# Altium PCB STC12C5A_DIP40_Mini.PcbDoc
Units mil, origin at the board's own origin, x right, y up, seen from the top; angles counter-clockwise.
Board outline 1220 x 2920 mil, 2 copper layers (Top Layer, Bottom Layer); 37 components, 81 nets, 204 pads, 15 vias.
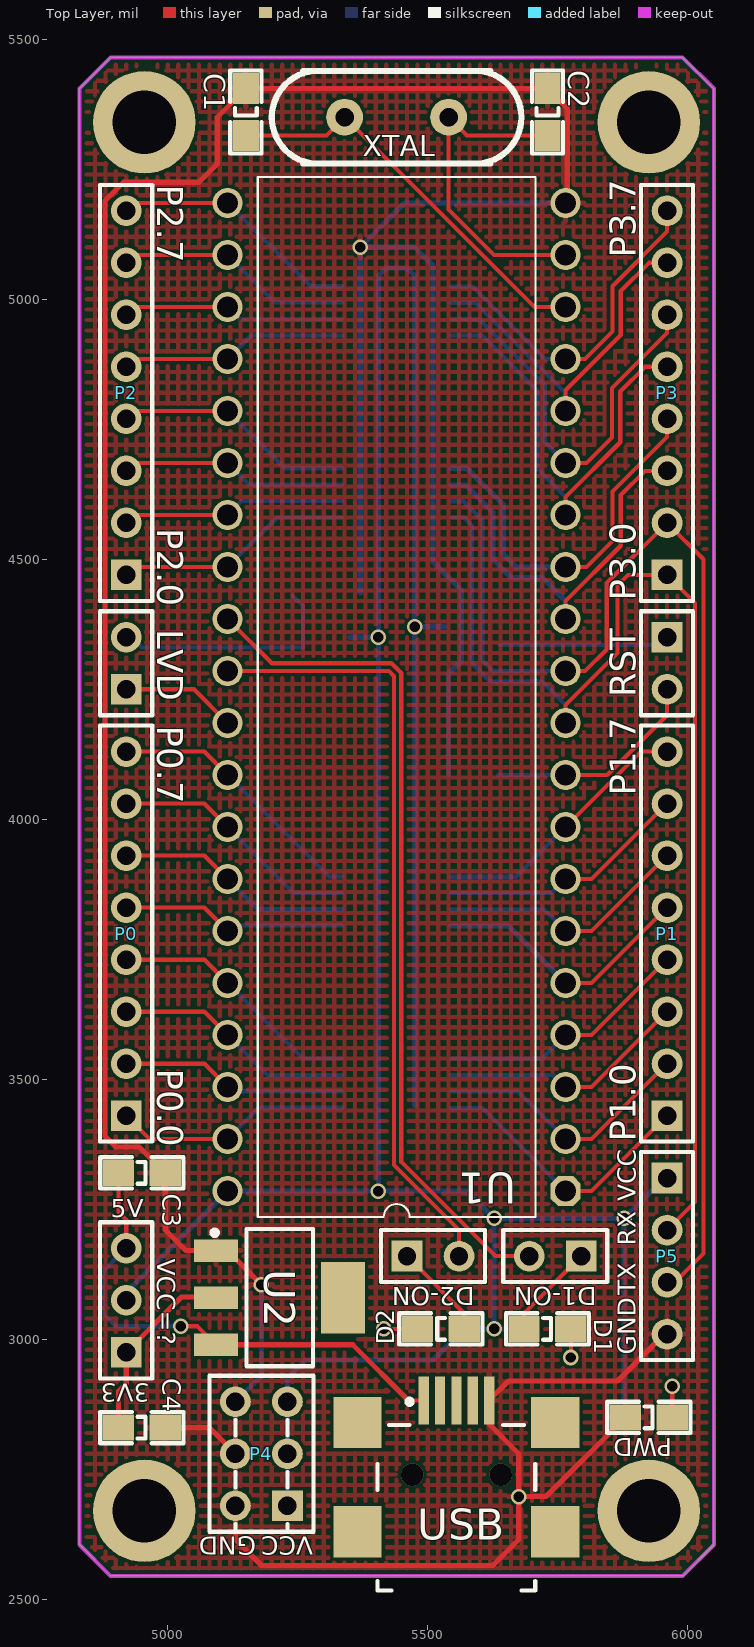
[diagram p0: Top Layer view]
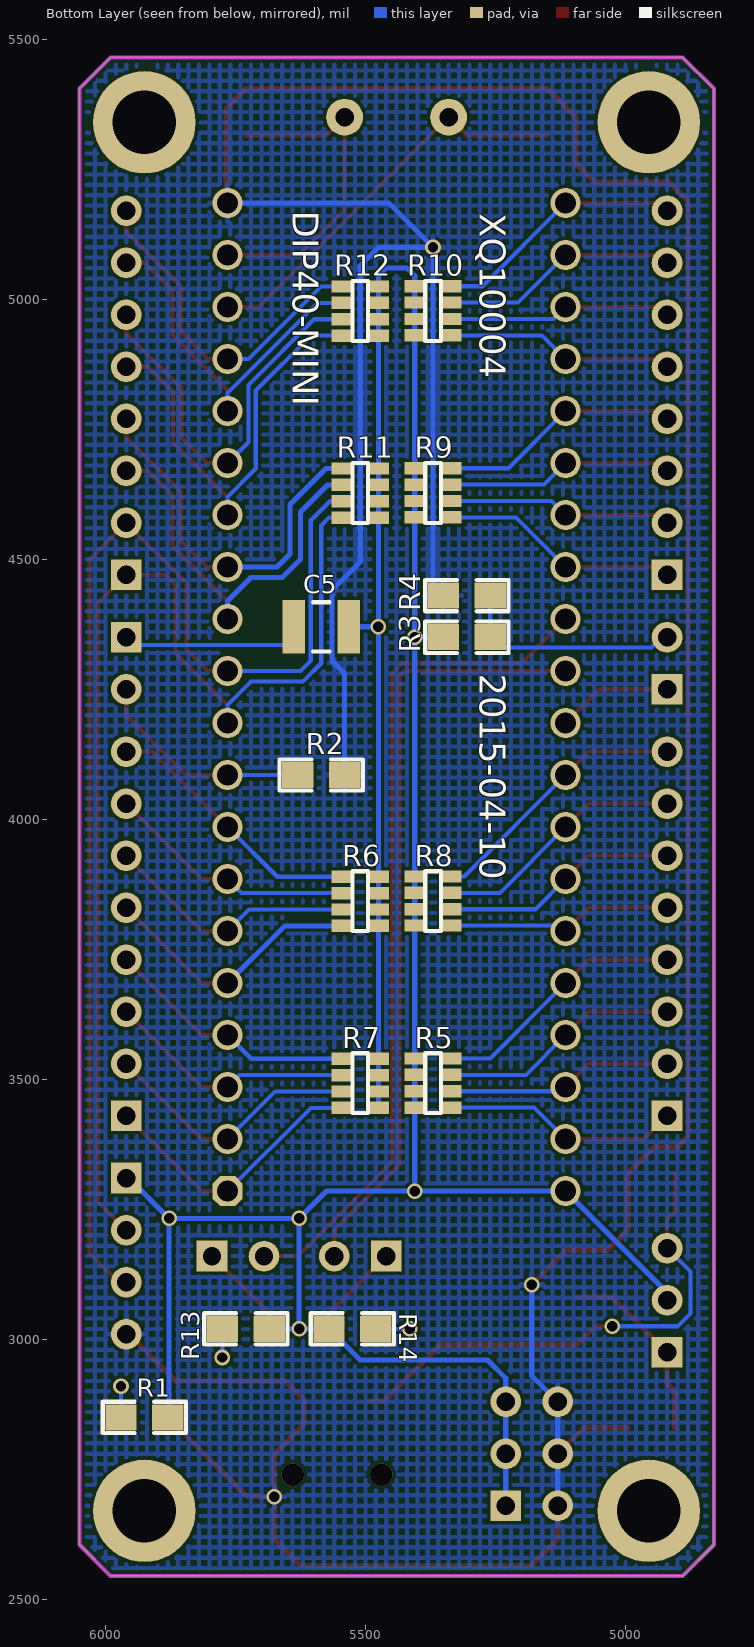
[diagram p1: Bottom Layer view, seen from below]

## Layer stack, top to bottom
Top Layer: signal copper 1.4
Dielectric: dielectric 12.6, FR-4, Dk 4.8
Bottom Layer: signal copper 1.4

## Board outline
4830,2605 4830,5405 4890,5465 5990,5465 6050,5405 6050,2605 5990,2545 4890,2545

## Design rules (kind name [scope] priority, off if disabled: settings)
Clearance [All] p1: gap=6
FabricationTestPointUsage TestPointUsage [All] p1: valid=0 allowmultiple=FALSE
FabricationTestpoint Testpoint [All] p1: side=3 testpointundercomponent=TRUE minsize=40 maxsize=100 preferedsize=60 minholesize=0 maxholesize=40 preferedholesize=32 testpointgrid=1 allowsidetop=TRUE allowsidebottom=TRUE usegrid=TRUE gridtolerance=0.01
HoleSize [All] p1: absolutevalues=TRUE maxlimit=200 minlimit=1 maxpercent=80.000 minpercent=20.000
MinimumSolderMaskSliver [All] p1: minsoldermaskwidth=6
PolygonConnect [All] p1: connectstyle=Relief reliefconductorwidth=10 reliefentries=4 polygonreliefangle="90 Angle"
RoutingVias [All] p1: holewidth=20 width=30 viastyle="Through Hole" minholewidth=20 minwidth=30 maxholewidth=30 maxwidth=50
SilkToSilkClearance [All] p1: silktosilkclearance=6
SilkscreenOverComponentPads [All] p1: minsilkscreentomaskgap=6
SolderMaskExpansion [All] p1: expansion=4
Width [All] p1: maxlimit=200 minlimit=6 preferedwidth=8
22 further rules are at their usual default settings.

## Components (designator, comment, footprint, x,y, rotation, side; value= is the part's Value field where it differs from the comment)
C1 "Cap" C0805 5150,5315 r90 top
C2 "Cap" C0805 5730,5315 r90 top
C3 "Cap" C0805 4995,3320 r180 top
C4 "Cap" C0805 4995,2830 r180 top
C5 "Cap2" C1210 5585,4370 r0 bottom
D1 "LED" C0805 5775,3020 r180 top (schematic designator D2)
D1-ON "Header 2" HDR1X2 5795,3160 r180 top (schematic designator LED1)
D2 "LED" C0805 5480,3020 r0 top (schematic designator D3)
D2-ON "Header 2" HDR1X2 5460,3160 r0 top (schematic designator LED2)
LVD "Header 2" HDR1X2 4920,4250 r90 top locked
P0 "Header 8" HDR1X8 4920,3430 r90 top locked
P1 "Header 8" HDR1X8 5960,3430 r90 top locked
P2 "Header 8" HDR1X8 4920,4470 r90 top locked
P3 "Header 8" HDR1X8 5960,4470 r90 top
P4 "Header 3X2" HDR2X3 5230,2680 r90 top
P5 "Header 4" HDR1X4 5960,3310 r270 top
PWD "PWB" C0805 5970,2850 r180 top (schematic designator D1)
R1 "Res" 0805 5970,2850 r180 bottom
R2 "Res" 0805 5540,4085 r0 bottom
R3 "Res" 0805 5260,4350 r0 bottom
R4 "Res" 0805 5350,4430 r180 bottom
R5 "RES_8P" RES_8P_0603 5405,3540 r180 bottom
R6 "RES_8P" RES_8P_0603 5405,3890 r180 bottom
R7 "RES_8P" RES_8P_0603 5475,3445 r0 bottom
R8 "RES_8P" RES_8P_0603 5475,3795 r0 bottom
R9 "RES_8P" RES_8P_0603 5405,4675 r180 bottom
R10 "RES_8P" RES_8P_0603 5405,5025 r180 bottom
R11 "RES_8P" RES_8P_0603 5475,4580 r0 bottom
R12 "RES_8P" RES_8P_0603 5475,4930 r0 bottom
R13 "Res" 0805 5775,3020 r180 bottom
R14 "Res" 0805 5480,3020 r0 bottom
RST "Header 2" HDR1X2 5960,4350 r270 top locked
U1 "STC12C5A60S2_DIP40" DIP40 5765,3285 r180 top locked
U2 "AMS1117" SOT-223 5215,3080 r270 top
USB "USB-MINI" USB-MINI-B-SM 5555,2785 r270 top (schematic designator J1)
VCC=? "Header 3" HDR1X3 4920,2975 r90 top (schematic designator P7)
XTAL "XTAL" XTAL1 5340,5350 r0 top locked (schematic designator Y1)

## Footprints (in the part's own frame and the unit in brackets; to place one, negate y for a bottom-side part, rotate by r counter-clockwise, add the part's x,y. Pads: shape width x height; smd on the part's side, far side on the other; paste and mask are expansions set on the pad)
0805 [mil]
  rect 60x50 smd: 1(0,0) 2(90,0)
  silkscreen extent -35,-30 125,30
C0805 [mil]
  rect 60x50 smd: 1(0,0) 2(90,0)
  silkscreen extent -35,-30 125,30
C1210 [mm] "Chip Capacitor, Body 3.2x2.5mm, IPC High Density"
  rect 1.1x2.6 smd: 1(-1.35,0) 2(1.35,0)
  silkscreen extent -0.4,-1.2 0.4,1.2, body extent -1.7,-1.35 1.7,1.35, height 1.3
DIP40 [mil]
  oct 58x58 hole 40: 1(0,0)
  round 58 hole 40: 2(0,-100) 3(0,-200) 4(0,-300) 5(0,-400) 6(0,-500) 7(0,-600) 8(0,-700) 9(0,-800) 10(0,-900) 11(0,-1000) 12(0,-1100) 13(0,-1200) 14(0,-1300) 15(0,-1400) 16(0,-1500) 17(0,-1600) 18(0,-1700) 19(0,-1800) 20(0,-1900) 21(650,-1900) 22(650,-1800) 23(650,-1700) 24(650,-1600) 25(650,-1500) 26(650,-1400) 27(650,-1300) 28(650,-1200) 29(650,-1100) 30(650,-1000) 31(650,-900) 32(650,-800) 33(650,-700) 34(650,-600) 35(650,-500) 36(650,-400) 37(650,-300) 38(650,-200) 39(650,-100) 40(650,0)
  silkscreen extent 58,-1950 592,50
HDR1X2 [mm] "Connector; Header; 2 Position"
  rect 1.5x1.5 hole 0.9: 1(0,0)
  round 1.5 hole 0.9: 2(2.54,0)
  silkscreen extent -1.27,-1.27 3.81,1.27
HDR1X3 [mm] "Connector; Header; 3 Position"
  rect 1.5x1.5 hole 0.9: 1(0,0)
  round 1.5 hole 0.9: 2(2.54,0) 3(5.08,0)
  silkscreen extent -1.27,-1.27 6.35,1.27
HDR1X4 [mm] "Connector; Header; 4 Position"
  rect 1.5x1.5 hole 0.9: 1(0,0)
  round 1.5 hole 0.9: 2(2.54,0) 3(5.08,0) 4(7.62,0)
  silkscreen extent -1.27,-1.27 8.89,1.27
HDR1X8 [mm] "Connector; Header; 8 Position"
  rect 1.5x1.5 hole 0.9: 1(0,0)
  round 1.5 hole 0.9: 2(2.54,0) 3(5.08,0) 4(7.62,0) 5(10.16,0) 6(12.7,0) 7(15.24,0) 8(17.78,0)
  silkscreen extent -1.27,-1.27 19.05,1.27
HDR2X3 [mm] "Connector; Header; 3x2 Position"
  rect 1.5x1.5 hole 0.9: 1(0,0)
  round 1.5 hole 0.9: 2(0,2.54) 3(2.54,0) 4(2.54,2.54) 5(5.08,0) 6(5.08,2.54)
  silkscreen extent -1.27,-1.27 6.35,3.81
RES_8P_0603 [mm]
  rect 1.016x0.6 smd: 1(0,0) 2(1.778,0) 3(0,-0.8) 4(1.778,-0.8) 5(0,-1.6) 6(1.778,-1.6) 7(0,-2.4) 8(1.778,-2.4)
  silkscreen extent 0.51,-2.67 1.27,0.25
SOT-223 [mm] "SOT-223/SC-73; 4 Leads; Body 6.7 x 7."
  rect 1.1x2.15 smd: 1(-2.3,-3.1) 2(0,-3.1) 3(2.3,-3.1)
  rect 3.5x2.15 smd: 4(0,3.1)
  silkscreen extent -3.35,-3.3 3.35,1.62
USB-MINI-B-SM [mm] "Connector; USB Mini-B, Sinking Type, SM; 5 Position; Right Angle"
  rect 2.35x0.5 smd: 1(-2.465,-1.6) 2(-2.465,-0.8) 3(-2.465,0) 4(-2.466,0.8) 5(-2.465,1.6)
  rect 2.5x2.35 smd: ""(-1.397,4.826) ""(-1.397,-4.826) ""(3.937,4.826) ""(3.937,-4.826)
  silkscreen extent -2.54,-3.85 6.81,3.85
XTAL1 [mm]
  round 1.8 hole 0.9: 1(0,0) 2(5.08,0)
  silkscreen extent -3.56,-2.26 8.64,2.26

## Part data
C1 C2 C3 C4 C5: "Capacitor"
D1 D2 PWD: library part LED-2P, "发?"
D1-ON D2-ON LVD RST: "Header, 2-Pin"
P0 P1 P2 P3: "Header, 8-Pin"
P4: "Header, 3-Pin, Dual row"
P5: "Header, 4-Pin"
R1 R2 R3 R4 R13 R14: "Resistor"
R5 R6 R7 R8 R9 R10 R11 R12: "ÌùÆ"
U1: "增强"
U2: "低压稳压器-1A"
VCC=?: "Header, 3-Pin"
XTAL: "Crystal Oscillator"

## Free pads (board coordinates)
  round 196.85 hole 122.05: 0(5925,2670) 1(4955,2670) 2(5925,5340) 3(4955,5340)

## Via types
v1: diameter 30, hole 20, Top Layer to Bottom Layer, 13 vias
v2: diameter 43.31, hole 43.31, Top Layer to Bottom Layer, 2 vias

## Nets (pads, with @x,y where several pads share a name; then routed paths per layer and width w, separated by ;. In a path a pad name is that pad's centre, name@x,y a point inside that pad or via, vN(x,y) a via of type N, cw(c..) or ccw(c..) an arc to the next point about the centre after c; other vN are vias at no path point)
3V3: C4.2 U2.2 VCC=?.1 | length 366.8
  Top Layer w10: C4.2 4905,2900 4920,2915 VCC=?.1 5026.48,3081.48 U2.2@5091.48,3081.48
5V: C3.2 U2.3 USB.1 VCC=?.3 | length 981.4
  Top Layer w8: C3.2 4905,3245 4920,3230 VCC=?.3 ; v1(5025,3025) 5057.4,3025 U2.3 ; 5462.93,2882.07 USB.1
  Top Layer w10: U2.3 5355.55,2989.45 5462.93,2882.07
  Bottom Layer w8: VCC=?.3 4875,3130 4875,3050 4900,3025 v1(5025,3025)
GND: C1.2 C2.2 C3.1 C4.1 P4.2 P4.4 P4.6 P5.4 PWD.2 R2.1 R4.1 U1.20 U2.1 USB.5 | length 7971.3
  Top Layer w10: C4.1 5080,2830 P4.4 ; P4.2 5130,2615 5180,2565 5625,2565 5675,2615 v1(5675,2697.5) ; v1(5180,3105) 5114.45,3170.55 U2.1 5034.45,3170.55 4995,3210 C3.1 4945,3370 4900,3370 4879.47,3390.53 4879.47,5189.47 4915,5225 5060,5225 5095,5260 5095,5350 C1.2 C2.2 5768,5367 5768,5188 U1.20 ; PWD.2 5727.5,2697.5 v1(5675,2697.5) ; P5.4 5955,3010 5865,2920 5655,2920 5617.99,2882.99 USB.5 5617.99,2837.01 5675,2780 v1(5675,2697.5)
  Bottom Layer w10: P4.2 P4.4 P4.6 5180,2930 v1(5180,3105) ; R4.1@5370,4435 v1(5370,5100) ; R2.1 5540,4280 5564.5,4304.5 5564.5,4440.5 5510,4495 5510,5065 5475,5100 v1(5370,5100) ; U1.20@5755,5185 5455,5185 v1(5370,5100)
NetC5_2: C5.2 RST.1 | length 321.9
  Bottom Layer w8: C5.2@5638.15,4335 RST.1@5960,4335
NetD1_1: PWD.1 R1.1 | length 120
  Top Layer w8: PWD.1 v1(5970,2910)
  Bottom Layer w8: R1.1 v1(5970,2910)
NetD2_1: D1.1 R13.1 | length 110
  Top Layer w8: v1(5775,2965) D1.1
  Bottom Layer w8: v1(5775,2965) R13.1
NetD2_2: D1-ON.1 D1.2 | length 185.6
  Top Layer w8: D1.2 5685,3050 D1-ON.1
NetD3_1: D2.1 R14.1 | length 130
  Top Layer w8: v1(5415,3020) D2.1
  Bottom Layer w8: v1(5415,3020) R14.1
NetD3_2: D2-ON.1 D2.2 | length 185.6
  Top Layer w8: D2-ON.1 5570,3050 D2.2
NetLVD_2: LVD.2 R3.1 R4.2 | length 456.6
  Bottom Layer w8: LVD.2 4930,4350 4950,4330 5260,4330 5260,4410 R4.2@5240,4430
NetP0_1: P0.1 R5.8 U1.39 | length 458.7
  Top Layer w8: P0.1 4965,3385 U1.39
  Bottom Layer w8: U1.39 5175.51,3445.51 R5.8
NetP0_2: P0.2 R5.6 U1.38 | length 436.9
  Top Layer w8: P0.2 5070,3530 U1.38
  Bottom Layer w8: U1.38 5122.99,3477.01 R5.6
NetP0_3: P0.3 R5.4 U1.37 | length 475.3
  Top Layer w8: P0.3 5070,3630 U1.37
  Bottom Layer w8: U1.37@5125,3585 U1.37 5191.5,3508.5 R5.4
NetP0_4: P0.4 R5.2 U1.36 | length 508.7
  Top Layer w8: P0.4 5070,3730 U1.36
  Bottom Layer w8: U1.36@5115,3700 U1.36 5260,3540 R5.2
NetP0_5: P0.5 R6.8 U1.35 | length 438
  Top Layer w8: P0.5 5070,3830 U1.35
  Bottom Layer w8: U1.35 5125.51,3795.51 R6.8
NetP0_6: P0.6 R6.6 U1.34 | length 457.7
  Top Layer w8: P0.6 5070,3930 U1.34
  Bottom Layer w8: U1.34 5172.99,3827.01 R6.6
NetP0_7: P0.7 R6.4 U1.33 | length 500.2
  Top Layer w8: P0.7 5070,4030 U1.33
  Bottom Layer w8: U1.33@5125,3995 U1.33 5241.5,3858.5 R6.4
NetP0_8: P0.8 R6.2 U1.32 | length 514.4
  Top Layer w8: P0.8 5070,4130 U1.32
  Bottom Layer w8: U1.32 5310,3890 R6.2
NetP1_1: P1.1 R7.2 U1.1 | length 541.3
  Top Layer w8: U1.1 5815,3285 P1.1
  Bottom Layer w8: R7.2 5605,3445 U1.1
NetP1_2: P1.2 R7.4 U1.2 | length 513
  Top Layer w8: U1.2 5815,3385 P1.2
  Bottom Layer w8: R7.4 5673.5,3476.5 U1.2
NetP1_3: P1.3 R7.6 U1.3 | length 484.6
  Top Layer w8: U1.3 5815,3485 P1.3
  Bottom Layer w8: R7.6 5742.01,3507.99 U1.3
NetP1_4: P1.4 R7.8 U1.4 | length 493.9
  Top Layer w8: U1.4 5815,3585 P1.4
  Bottom Layer w8: R7.8 5719.49,3539.49 U1.4
NetP1_5: P1.5 R8.2 U1.5 | length 520.6
  Top Layer w8: U1.5 5815,3685 P1.5
  Bottom Layer w10: R8.2 5655,3795 U1.5
NetP1_6: P1.6 R8.4 U1.6 | length 492.2
  Top Layer w8: U1.6 5815,3785 P1.6
  Bottom Layer w8: R8.4 5723.5,3826.5 U1.6
NetP1_7: P1.7 R8.6 U1.7 | length 486.2
  Top Layer w8: U1.7 5815,3885 P1.7
  Bottom Layer w8: R8.6 5737.99,3857.99 U1.7
NetP1_8: P1.8 R8.8 U1.8 | length 535.1
  Top Layer w8: U1.8 5910,4130 P1.8
  Bottom Layer w8: R8.8 5669.49,3889.49 U1.8
  Bottom Layer w10: U1.8@5750.51,3999.49 U1.8
NetP2_1: P2.1 R9.8 U1.28 | length 460.8
  Top Layer w8: P2.1 4935,4485 U1.28
  Bottom Layer w8: U1.28 5210.51,4580.51 R9.8
NetP2_2: P2.2 R9.6 U1.27 | length 432.4
  Top Layer w8: P2.2 4935,4585 U1.27
  Bottom Layer w8: U1.27 5142.01,4612.01 R9.6
NetP2_3: P2.3 R9.4 U1.26 | length 438.4
  Top Layer w8: P2.3 4935,4685 U1.26
  Bottom Layer w8: U1.26 5156.5,4643.5 R9.4
NetP2_4: P2.4 R9.2 U1.25 | length 488
  Top Layer w8: P2.4 4935,4785 U1.25
  Bottom Layer w8: U1.25@5130,4800 U1.25 5225,4675 R9.2
NetP2_5: P2.5 R10.8 U1.24 | length 440.1
  Top Layer w8: P2.5 4935,4885 U1.24
  Bottom Layer w8: U1.24 5160.51,4930.51 R10.8
NetP2_6: P2.6 R10.6 U1.23 | length 476.9
  Top Layer w8: P2.6@4905,4970 P2.6@4920,4985 ; P2.6 4935,4985 U1.23
  Bottom Layer w8: U1.23@5140,4985 U1.23 5137.99,4962.01 R10.6
NetP2_7: P2.7 R10.4 U1.22 | length 480.3
  Top Layer w8: P2.7@4905,5070 P2.7@4920,5085 ; P2.7 4935,5085 U1.22
  Bottom Layer w8: U1.22 5206.5,4993.5 R10.4
NetP2_8: P2.8 R10.2 U1.21 | length 508.7
  Top Layer w8: P2.8@4905,5170 P2.8@4920,5185 ; P2.8 4935,5185 U1.21
  Bottom Layer w8: U1.21 5275,5025 R10.2
NetP3_3: P3.3 R11.6 U1.12 | length 791.3
  Top Layer w8: U1.12 5765,4420 5871,4526 5871,4623.37 5917.63,4670 P3.3
  Bottom Layer w10: R11.6 5572.99,4642.99 5625,4590.98 5625,4500 5660,4465 5720,4465 5765,4420 U1.12
NetP3_4: P3.4 R11.8 U1.13 | length 743.3
  Top Layer w8: U1.13 5805,4485 5855,4535 5855,4630 5960,4735 P3.4
  Bottom Layer w10: R11.8 5575.51,4674.49 5645,4605 5645,4510 5670,4485 U1.13
NetP3_5: P3.5 R12.2 U1.14 | length 861.9
  Top Layer w8: U1.14 5765,4620 5870,4725 5870,4822.37 5917.63,4870 P3.5
  Bottom Layer w8: R12.2 5605,4930 5711,4824 5711,4674 5765,4620 U1.14
NetP3_6: P3.6 R12.4 U1.15 | length 788.2
  Top Layer w8: U1.15 5805,4685 5854,4734 5854,4829 5960,4935 P3.6
  Bottom Layer w8: R12.4 5598.5,4961.5 5725,4835 5725,4725 U1.15
NetP3_7: P3.7 R12.6 U1.16 | length 712.9
  Top Layer w8: U1.16 5765,4825 5871,4931 5871,5016 5925,5070 P3.7
  Bottom Layer w8: R12.6 5592.01,4992.99 5765,4820 U1.16
NetP3_8: P3.8 R12.8 U1.17 | length 665.4
  Top Layer w8: U1.17 5802.37,4885 5855,4937.63 5855,5025 5960,5130 P3.8
  Bottom Layer w8: R12.8 5585.51,5024.49 5725,4885 U1.17
P0.0: 
P0.1: 
P0.2: 
P0.3: 
P0.4: 
P0.5: 
P0.6: 
P0.7: 
P1.0: 
P1.1: 
P1.2: 
P1.3: 
P1.4: 
P1.5: 
P1.6: 
P1.7: 
P2.0: 
P2.1: 
P2.2: 
P2.3: 
P2.4: 
P2.5: 
P2.6: 
P2.7: 
P3.0: 
P3.1: 
P3.2: 
P3.3: 
P3.4: 
P3.5: 
P3.6: 
P3.7: 
P4.4: D1-ON.2 U1.29 | length 1638.1
  Top Layer w8: U1.29 5200,4300 5429.8,4300 5449,4280.8 5449,3340.8 5629.8,3160 D1-ON.2
P4.5: D2-ON.2 U1.30 | length 1490.9
  Top Layer w8: U1.30 5425,4285 5435,4275 5435,3335 5560,3210 D2-ON.2
P4.6: LVD.1 U1.31 | length 221.9
  Top Layer w8: LVD.1 5050,4250 U1.31
P4.7: R2.2 RST.2 U1.9 | length 453.8
  Top Layer w8: U1.9 5845,4085 5960,4200 RST.2
  Bottom Layer w8: R2.2@5635,4085 U1.9@5755,4085 ; U1.9@5750,4080 U1.9@5755,4085 ; U1.9@5755,4085 U1.9 5765,4095 U1.9@5755,4085
RX: P3.1 P5.2 R11.2 U1.10 | length 2273.8
  Top Layer w8: U1.10 5765,4220 5865,4320 5865,4450 5885,4470 P3.1 6014,4416 6014,3264 P5.2
  Bottom Layer w8: R11.2 5570,4580 5585,4565 5585,4300 5620,4265 5720,4265 5765,4220 U1.10
TX: P3.2 P5.3 R11.4 U1.11 | length 2412.8
  Top Layer w8: U1.11 5802.37,4285 5844,4326.63 5844,4454 P3.2 6030,4500 6030,3165 P5.3@5975,3110
  Bottom Layer w8: R11.4 5568.5,4611.5 5605,4575 5605,4305 5625,4285 U1.11
VCC: C5.1 P4.1 P4.3 P4.5 P5.1 R1.2 R3.2 R5.1 R5.3 R5.5 R5.7 R6.1 R6.3 R6.5 R6.7 R7.1 R7.3 R7.5 R7.7 R8.1 R8.3 R8.5 R8.7 R9.1 R9.3 R9.5 R9.7 R10.1 R10.3 R10.5 R10.7 R11.1 R11.3 R11.5 R11.7 R12.1 R12.3 R12.5 R12.7 R13.2 R14.2 U1.40 VCC=?.2 | length 6089.3
  Top Layer w10: VCC=?.2 VCC=?.2@4920,3090
  Bottom Layer w10: VCC=?.2 4920,3090 U1.40 v1(5405,3285) ; P4.1 P4.3 P4.5 5230,2925 5265,2960 5510,2960 R14.2 v1(5627.5,3020) ; R3.2 v1(5405,4350) ; R7.1@5475,3450 R7.3 R7.5 R7.7 R8.1 R8.3 R8.5 R8.7 v1(5475,4370) ; C5.1 v1(5475,4370) ; R13.2 v1(5627.5,3020) ; R1.2 5877.5,2852.5 v1(5877.5,3232.5) ; P5.1 5955,3310 v1(5877.5,3232.5) ; v1(5405,3285) R5.7 R5.5 R5.3 R5.1 R6.7 R6.5 R6.3 R6.1 v1(5405,4350) ; v1(5405,3285) 5575,3285 v1(5627.5,3232.5) ; v1(5405,4350) R9.7 R9.5 R9.3 R9.1 R10.7 R10.5 R10.3 R10.1 5405,5045 5420,5060 5460,5060 5475,5045 R12.7 R12.5 R12.3 R12.1 R11.7 R11.5 R11.3 R11.1 v1(5475,4370) ; v1(5627.5,3020) v1(5627.5,3232.5) ; v1(5627.5,3232.5) v1(5877.5,3232.5)
XTAL1: C2.1 U1.19 XTAL.2 | length 643.2
  Top Layer w8: C2.1 5575,5315 XTAL.2 5540,5172.63 5627.63,5085 U1.19
XTAL2: C1.1 U1.18 XTAL.1 | length 780.7
  Top Layer w8: C1.1 5305,5315 XTAL.1 5705,4985 U1.18
pads on no net: U2.4 USB. USB.2 USB.3 USB.4
copper on no net:
  other v2: 5470,2740 5640,2740

## Polygon pours and split planes (outlines as drawn)
GND on Top Layer "Top Layer-No Net" (hatched 90Degree grid 20 track 8, remove dead copper, pour order 2): 4890,2545 5990,2545 6050,2605 6050,5405 5990,5465 4890,5465 4830,5405 4830,2605 4890,2545 5990,2545
GND on Bottom Layer "Top Layer-No Net" (hatched 90Degree grid 20 track 8, remove dead copper, pour order 4): 4830,5405 4890,5465 5990,5465 6050,5405 6050,2605 5990,2545 4890,2545 4830,2605 4830,5405

## Keep-outs
Keep-Out Layer:
  the board outline again, w8

## Silkscreen, mask and mechanical layers (free items; w line width, h text height)
Top Overlay:
  lines w8: 5130,2630 5130,2645 ; 5130,2715 5130,2745 ; 5130,2815 5130,2845 ; 5230,2630 5230,2645 ; 5230,2715 5230,2745 ; 5230,2815 5230,2845
  text "P2.7" at 4980,5220 h50 r270
  text "P3.7" at 5900,5080 h50 r90
  text "P2.0" at 4980,4560 h50 r270
  text "P3.0" at 5900,4420 h50 r90
  text "P0.7" at 4980,4180 h50 r270
  text "P1.7" at 5900,4045 h50 r90
  text "P0.0" at 4980,3520 h50 r270
  text "P1.0" at 5900,3380 h50 r90
  text "VCC" at 5900,3265 h35 r90
  text "5V" at 4890,3235 h35
  text "RX" at 5900,3180 h35 r90
  text "TX" at 5900,3085 h35 r90
  text "GND" at 5900,2970 h35 r90
  text "3V3" at 4965,2915 h35 r180
  text "GND" at 5170,2620 h35 r180
  text "VCC" at 5280,2620 h35 r180
Bottom Overlay:
  text "DIP40-MINI" at 5640,5170 h50 r90
  text "XQ10004" at 5280,5165 h50 r90
  text "2015-04-10" at 5280,4280 h50 r90
Mechanical 16:
  drawing of 1874 lines, arcs and shapes, not listed
  text "1" at 1427,7465 h70
  text "2" at 4287,7465 h70
  text "3" at 7167,7465 h70
  text "4" at 10037,7465 h70
  text "A" at 75,6559 h70
  text "A" at 11375,6559 h70
  text "B" at 75,4667 h70
  text "B" at 11375,4667 h70
  text "C" at 75,2757 h70
  text "ENGINEER:" at 6850,1300 h45
  text "TITLE:" at 8350,1300 h45
  text "PCB DESIGNER:" at 6850,1005 h45
  text "D" at 75,867 h70
  text "D" at 11375,867 h70
  text "DATE:" at 6850,700 h45
  text "PART NO.:" at 8350,700 h45
  text "REV:" at 10450,700 h45
  text "Altium Limited" at 5550,600 h70
  text ".PRINT_DATE" at 6900,580 h70
  text "12a Rodborough Rd" at 5550,500 h70
  text "Frenchs Forest" at 5550,400 h70
  text "FILE NAME:" at 6850,400 h45
  text "DWG NO:" at 8350,400 h45
  text "SCALE:" at 10450,400 h45
  text "NSW 2086" at 5550,300 h70
  text ".PCB_FILE_NAME_NO_PATH" at 6900,280 h70
  text "1" at 1427,65 h70
  text "2" at 4287,65 h70
  text "3" at 7167,65 h70
  text "4" at 10037,65 h70